# Altium PCB DAU_Kupplung_3phasig_V1_13.PcbDoc
Units mm, origin at the board's own origin, x right, y up, seen from the top; angles counter-clockwise.
Board outline 152.4 x 100.03 mm, 2 copper layers (Top, Bottom), stack 1.57 mm thick; 109 components, 76 nets, 355 pads, 18 vias.
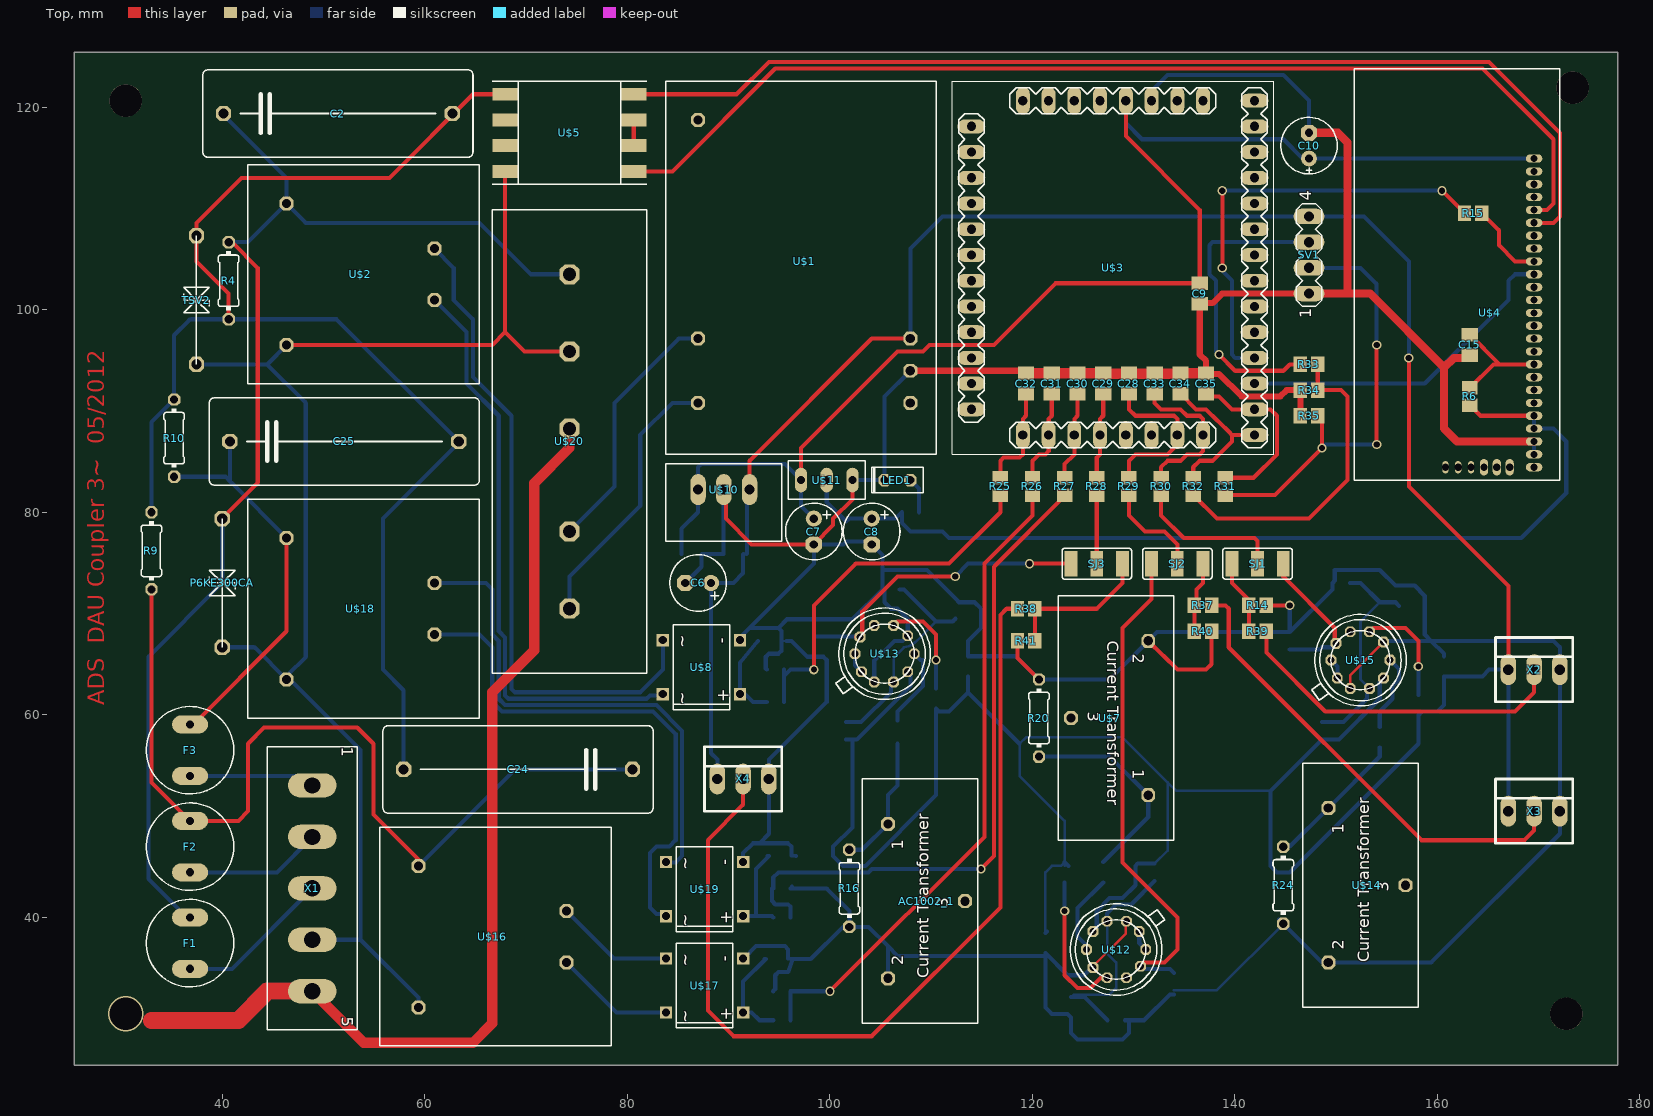
[diagram p0: Top view]
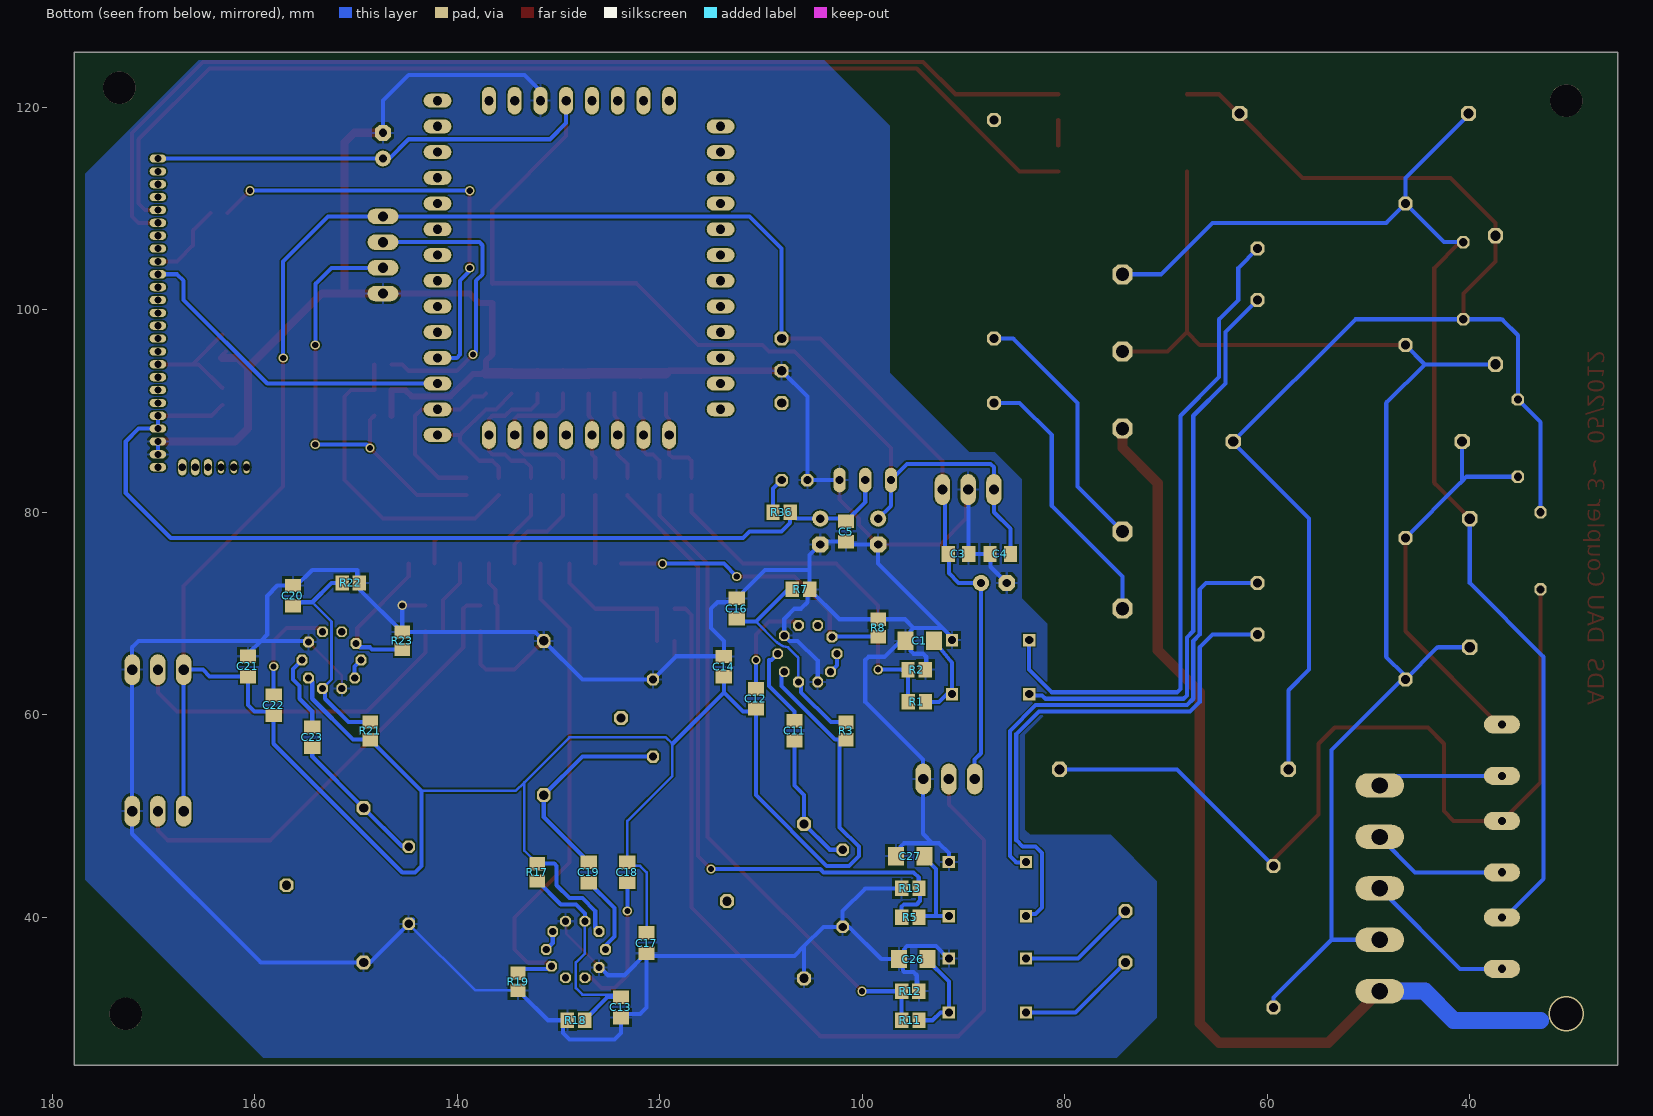
[diagram p1: Bottom view, seen from below]

## Layer stack, top to bottom
Top Solder: solder mask 0.0102, Solder Resist, Dk 3.5
Top: signal copper 0.035
Dielectric 1: core 1.5, FR-4, Dk 4.8
Bottom: signal copper 0.035
Bottom Solder: solder mask 0.0102, Solder Resist, Dk 3.5

## Board outline
25.4,25.4 177.8,25.4 177.8,125.425 25.4,125.425

## Design rules (kind name [scope] priority, off if disabled: settings)
Clearance mdViaVia [IsVia vs IsVia] p1: gap=0.15
Clearance mdPadVia [IsPad vs IsVia] p2: gap=0.15
Clearance mdPadPad [IsPad vs IsPad] p3: gap=0.15
Clearance mdWireVia [(InLayerClass('Signal Layers') AND IsTrack) vs IsVia] p4: gap=0.15
Clearance mdWirePad [(InLayerClass('Signal Layers') AND IsTrack) vs IsPad] p5: gap=0.15
Clearance mdWireWire [(InLayerClass('Signal Layers') AND IsTrack) vs (InLayerClass('Signal Layers') AND IsTrack)] p6: gap=0.15
Clearance [All] p7: gap=0.15
HoleSize [All] p1: absolutevalues=TRUE maxlimit=2540 minlimit=0.3 maxpercent=80.000 minpercent=20.000
HoleToHoleClearance [All] p1: gap=0.2 allowstackedmicrovias=TRUE
PolygonConnect ThermalVias [IsVia] p1: connectstyle=Direct reliefconductorwidth=0.254 reliefentries=4 polygonreliefangle="90 Angle" airgapwidth=0.254
PolygonConnect [All] p2: connectstyle=Relief reliefconductorwidth=0.254 reliefentries=4 polygonreliefangle="90 Angle" airgapwidth=0.254
RoutingVias [All] p1: holewidth=0.711 width=1.27 viastyle="Through Hole" minholewidth=0.711 minwidth=1.27 maxholewidth=0.711 maxwidth=1.27
SilkToSilkClearance [All] p1 off: silktosilkclearance=0.254
SilkToSolderMaskClearance [IsPad] p1 off: minsilkscreentomaskgap=0.254 clearancetoexposedcopper=TRUE
SolderMaskExpansion [All] p1: expansion=0.075
Width [All] p1: maxlimit=2540 minlimit=0.15 preferedwidth=0.254
26 further rules are at their usual default settings.

## Components (designator, comment, footprint, x,y, rotation, side; value= is the part's Value field where it differs from the comment)
AC1002_1 "" AC1010 114.63,28.905 r90 top
C1 "4,7µ" C1206 94.31,67.31 r0 bottom
C2 "470n/270V" C225-087X268 51.435,119.38 r0 top
C3 "100n" C0805K 90.5,75.895 r180 bottom
C4 "100n" C0805K 86.36,75.895 r0 bottom
C5 "100n" C0805K 101.6,78.105 r270 bottom
C6 "4,7µ" E2,5-6 86.995,73.025 r180 top
C7 "4,7µ" E2,5-6 98.425,78.105 r270 top
C8 "4,7µ" E2,5-6 104.14,78.105 r270 top
C9 "100n" C0805K 136.525,101.6 r90 top
C10 "4µ7" E2,5-6E 147.32,116.205 r90 top
C11 "1µ" C0805K 106.68,58.42 r90 bottom
C12 "4µ7" C0805K 110.49,61.595 r270 bottom
C13 "1µ" C0805K 123.825,31.115 r270 bottom
C14 "1µ" C0805K 113.665,64.77 r270 bottom
C15 "1µ" C0805K 163.195,96.52 r90 top
C16 "1µ" C0805K 112.395,70.485 r90 bottom
C17 "1µ" C0805K 121.285,37.465 r90 bottom
C18 "4µ7" C0805K 123.19,44.45 r90 bottom
C19 "1µ" C0805K 127,44.45 r270 bottom
C20 "1µ" C0805K 156.21,71.755 r90 bottom
C21 "1µ" C0805K 160.655,64.77 r90 bottom
C22 "4µ7" C0805K 158.115,60.96 r270 bottom
C23 "1µ" C0805K 154.305,57.785 r90 bottom
C24 "470n/270V" C225-087X268 69.215,54.61 r180 top
C25 "470n/270V" C225-087X268 52.07,86.995 r0 top
C26 "4,7µ" C1206 94.945,35.89 r0 bottom
C27 "4,7µ" C1206 95.25,46.05 r0 bottom
C28 "100n" C0805K 129.54,92.71 r90 top
C29 "100n" C0805K 127,92.71 r90 top
C30 "100n" C0805K 124.46,92.71 r90 top
C31 "100n" C0805K 121.92,92.71 r90 top
C32 "100n" C0805K 119.38,92.71 r90 top
C33 "100n" C0805K 132.08,92.71 r90 top
C34 "100n" C0805K 134.62,92.71 r90 top
C35 "100n" C0805K 137.16,92.71 r90 top
F1 "T250mA/240V" TR5 36.83,37.465 r90 top
F2 "T250mA/240V" TR5 36.83,46.99 r90 top
F3 "T250mA/240V" TR5 36.83,56.515 r90 top
LED1 "" LED2X5 106.68,83.185 r180 top
P6KE300CA "" TSV 40.005,74.295 r270 top
R1 "820k" R0805 94.615,61.29 r180 bottom
R2 "180k" R0805 94.615,64.465 r0 bottom
R3 "22k" R0805 101.6,58.42 r270 bottom
R4 "470k" 0204/7 40.64,102.87 r90 top
R5 "820k" R0805 95.25,40.005 r180 bottom
R6 "1M" R0805 163.195,91.44 r90 top
R7 "10k" R0805 106.045,72.39 r0 bottom
R8 "4k7" R0805 98.425,68.58 r90 bottom
R9 "470k" 0204/7 33.02,76.2 r270 top
R10 "470k" 0204/7 35.255,87.325 r270 top
R11 "820k" R0805 95.25,29.845 r180 bottom
R12 "180k" R0805 95.25,32.715 r0 bottom
R13 "180k" R0805 95.25,42.875 r180 bottom
R14 "220R/33k" R0805 142.24,70.815 r180 top
R15 "330R" R0805 163.525,109.55 r0 top
R16 "68R" 0204/7 101.93,42.875 r90 top
R17 "22k" R0805 132.08,44.45 r90 bottom
R18 "10k" R0805 128.27,29.845 r180 bottom
R19 "4k7" R0805 133.985,33.655 r270 bottom
R20 "68R" 0204/7 120.65,59.69 r270 top
R21 "22k" R0805 148.59,58.42 r270 bottom
R22 "10k" R0805 150.495,73.025 r0 bottom
R23 "4k7" R0805 145.415,67.31 r90 bottom
R24 "68R" 0204/7 144.78,43.18 r90 top
R25 "10R" R0805 116.84,82.55 r90 top
R26 "10R" R0805 120.015,82.55 r90 top
R27 "10R" R0805 123.19,82.55 r90 top
R28 "10R" R0805 126.365,82.55 r90 top
R29 "10R" R0805 129.54,82.55 r90 top
R30 "10R" R0805 132.715,82.55 r90 top
R31 "10R" R0805 139.065,82.55 r90 top
R32 "10R" R0805 135.89,82.55 r90 top
R33 "680k" R0805 147.32,94.615 r180 top
R34 "470k" R0805 147.32,92.075 r0 top
R35 "220R" R0805 147.32,89.535 r0 top
R36 "330R" R0805 107.95,80.01 r0 bottom
R37 "0/82k" R0805 136.855,70.815 r180 top
R38 "0/82k" R0805 119.38,70.485 r0 top
R39 "0/82k" R0805 142.24,68.275 r180 top
R40 "220R/33k" R0805 136.855,68.275 r180 top
R41 "220R/33k" R0805 119.38,67.31 r0 top
SJ1 "" SJ_2W 142.24,74.93 r0 top
SJ2 "" SJ_2W 134.315,74.93 r180 top
SJ3 "" SJ_2W 126.365,74.93 r180 top
SV1 "" MA04-1 147.32,105.41 r90 top
TSV2 "" TSV 37.465,102.235 r270 top
U$1 "" RAC04_12SA 83.82,122.555 r270 top
U$2 "" TRAFO_0,35VA 42.545,92.71 r0 top
U$3 "" ADUC_MINIMUM 128.27,104.14 r0 top
U$4 "" MODEM_FUSS 160.655,104.775 r90 top
U$5 "" PLC-UEBERTRAGER_V2 74.295,117.475 r0 top
U$7 "" AC1010 122.555,72.39 r270 top
U$8 "" RECTIFIER 83.515,68.91 r270 top
U$10 "" RECOM785X 89.535,84.785 r180 top
U$11 "" TS1084_HOCH 102.235,83.185 r180 top
U$12 "" TO100_10PIN 128.27,36.83 r90 top
U$13 "" TO100_10PIN 105.41,66.04 r270 top
U$14 "" AC1010 158.115,30.48 r90 top
U$15 "" TO100_10PIN 152.4,65.405 r270 top
U$16 "" TRAFO_0,35VA 55.575,27.305 r0 top
U$17 "" RECTIFIER 83.82,37.465 r270 top
U$18 "" TRAFO_0,35VA 42.545,59.69 r0 top
U$19 "" RECTIFIER 83.82,46.99 r270 top
U$20 "" NETZFILTER 66.675,109.855 r270 top
X1 "" CONNECTOR_5_POL 44.45,56.845 r270 top
X2 "22-23-2031" 22-23-2031 169.545,64.465 r0 top
X3 "22-23-2031" 22-23-2031 169.545,50.495 r0 top
X4 "22-23-2031" 22-23-2031 91.44,53.67 r0 top

## Footprints (in the part's own frame and the unit in brackets; to place one, negate y for a bottom-side part, rotate by r counter-clockwise, add the part's x,y. Pads: shape width x height; smd on the part's side, far side on the other; paste and mask are expansions set on the pad)
22-23-2031 [mil] "22-23-2031"
  oval 60x120 hole 40: 1(-100,0) 2(0,0) 3(100,0)
  silkscreen extent -150,-125 150,125
0204/7 [mil] "0204/7"
  oct 48x48 hole 32: 1(-150,0) 2(150,0)
  silkscreen extent -115,-40 115,40
AC1010 [mil] "AC1010"
  oct 54x54 hole 36: P$1(800,350) P$2(200,350) P$3(500,50)
  silkscreen extent 25,0 975,450
ADUC_MINIMUM [mil] "ADUC_MINIMUM"
  oval 54x108 hole 36: ADC0(-362.5,-650) ADC1(-262.5,-650) ADC2(-162.5,-650) ADC3(-62.5,-650) ADC4(238,-650) ADC5(338,-650) DAC0(38,-650) DAC1(138,-650) GND(138,650) GND2(-162.5,650) GND3(-262.5,650) P22(338,650) P23(238,650) P24(-362.5,650) VCC(38,650) VCC1(-62.5,650)
  oval 108x54 hole 36: ADC6(538,-650) ADC7(538,-550) ALE(-562.5,250) INT0(538,-250) MISO(538,-150) MOSI(538,450) P00(-562.5,150) P01(-562.5,50) P02(-562.5,-50) P03(-562.5,-150) P04(-562.5,-250) P05(-562.5,-350) P06(-562.5,-450) P07(-562.5,-550) P20(538,550) P21(538,650) P25(-562.5,550) P34(538,-50) P35(538,50) P36(538,150) P37(538,250) PWM0(-562.5,450) PWM1(-562.5,350) RXD(538,-450) SCLOCK(538,350) TXD(538,-350)
  silkscreen extent -638,-725 612,725
C225-087X268 [mil] "C225-087X268"
  oct 60x60 hole 40: 1(-445,0) 2(445,0)
  silkscreen extent -525,-170 525,170
C0805K [mil] "C0805K"
  rect 52x63 smd: 1(-39.37,0) 2(40,0)
C1206 [mil] "C1206"
  rect 63x71 smd: 1(-55.12,0) 2(56,0)
CONNECTOR_5_POL [mil] "CONNECTOR_5_POL"
  oval 94.5x189 hole 63: P$1(150,175) P$2(350,175) P$3(550,175) P$4(750,175) P$5(950,175)
  silkscreen extent 0,0 1100,350
E2,5-6 [mil] "E2,5-6"
  round 63 hole 32: +(-50,0)
  oct 63x63 hole 32: -(50,0)
  silkscreen extent -110,-110 110,110
E2,5-6E [mil] "E2,5-6E"
  round 62 hole 32: +(-50,0)
  oct 62x62 hole 32: -(50,0)
  silkscreen extent -110,-110 110,110
LED2X5 [mil] "LED2X5"
  oct 48x48 hole 32: A(-50,0) K(50,0)
  silkscreen extent -100,-50 100,50
MA04-1 [mil] "MA04-1"
  oval 60x120 hole 40: 1(-150,0) 2(-50,0) 3(50,0) 4(150,0)
  silkscreen extent -200,-50 200,50
MODEM_FUSS [mil] "MODEM_FUSS"
  oval 32x64 hole 28: P$1(-800,-350) P$2(-750,-350) P$3(-700,-350) P$4(-650,-350) P$5(-600,-350) P$6(-550,-350) P$7(-500,-350) P$8(-450,-350) P$9(-400,-350) P$10(-350,-350) P$11(-300,-350) P$12(-250,-350) P$13(-200,-350) P$14(-150,-350) P$15(-100,-350) P$16(-50,-350) P$17(0,-350) P$18(50,-350) P$19(100,-350) P$20(150,-350) P$21(200,-350) P$22(250,-350) P$23(300,-350) P$24(350,-350) P$25(400,-350)
  oval 48x24 hole 28: P$26(-800,-5) P$27(-800,-55) P$28(-800,-105)
  oval 64x32 hole 28: P$29(-800,-155) P$30(-800,-205) P$31(-800,-255)
  silkscreen extent -850,-450 750,350
NETZFILTER [mil] "NETZFILTER"
  oct 78x78 hole 52: L(250,300) L'(1550,300) N(550,300) N'(1250,300) PE(850,300)
  silkscreen extent 0,0 1800,600
PLC-UEBERTRAGER_V2 [mm] "PLC-UEBERTRAGER_V2"
  rect 2.54x1.27 smd: 1LINE1(6.35,3.81) 2(6.35,1.27) 3(6.35,-1.27) 4LINE2(6.35,-3.81) 6NC(-6.35,1.27) 7NC(-6.35,-1.27) 8N(-6.35,-3.81) L5(-6.35,3.81)
  silkscreen extent -7.62,-5.08 7.62,5.08
R0805 [mil] "R0805"
  rect 52x60 smd: 1(-33.46,0) 2(34,0)
RAC04_12SA [mil] "RAC04_12SA"
  oct 54x54 hole 36: +VO(1000,950) GND(1125,950) L(1250,125) N(1000,125) NC(150,125) NC1(1250,950)
  silkscreen extent 0,0 1450,1050
RECOM785X [mil] "RECOM785X"
  oval 60x120 hole 40: GND(0,100) VIN(-100,100) VOUT(100,100)
  silkscreen extent -225,0 225,300
RECTIFIER [mil] "RECTIFIER"
  rect 48x48 hole 32: +(270,300) -(60,300) ~1(60,0) ~2(270,0)
  silkscreen extent 0,40 330,260
SJ_2W [mm] "SJ_2W"
  rect 1.27x2.54 smd: 1(-2.54,0) 2(0,0) 3(2.54,0)
  silkscreen extent -3.43,-1.52 3.43,1.52
TO100_10PIN [mil] "TO100_10PIN"
  oct 42x42 hole 28: 1(110,-40) 2(110,35) 3(70,90) 4(0,115) 5(-70,90) 6(-110,35) 7(-110,-40) 8(-65,-95) 9(0,-115) 10(70,-90)
  silkscreen extent -178,-190 178,178
TR5 [mil] "TR5"
  oval 70x140 hole 32: 1(-100,0) 2(100,0)
  silkscreen extent -170,-170 170,170
TRAFO_0,35VA [mil] "TRAFO_0,35VA"
  oct 54x54 hole 36: L(150,700) N(150,150) OUT1(725,525) OUT2(725,325)
  silkscreen extent 0,0 900,850
TS1084_HOCH [mil] "TS1084_HOCH"
  oval 48x96 hole 32: GND(0,0) IN(200,0) OUT(100,0)
  silkscreen extent -50,-75 250,75
TSV [mil] "TSV"
  oct 60x60 hole 40: P$1(-200,0) P$2(300,0)
  silkscreen extent -200,-50 300,50

## Part data
AC1002_1 U$7 U$14: library part AC1010
C1 C26 C27: library part C1206
C2 C24 C25: library part C225-087X268
C3 C4 C5 C9 C11 C12 C13 C14 C15 C16 C17 C18 C19 C20 C21 C22 C23 C28 C29 C30 C31 C32 C33 C34 C35: library part C0805K
C6 C7 C8: library part E2,5-6
C10: library part E2,5-6E
F1 F2 F3: library part TR5
LED1: library part LED2X5
P6KE300CA TSV2: library part TSV
R1 R2 R3 R5 R6 R7 R8 R11 R12 R13 R14 R15 R17 R18 R19 R21 R22 R23 R25 R26 R27 R28 R29 R30 R31 R32 R33 R34 R35 R36 R37 R38 R39 R40 R41: library part R0805
R4 R9 R10 R16 R20 R24: library part 0204/7
SJ1 SJ2 SJ3: library part SJ_2W
SV1: library part MA04-1
U$1: library part RAC04_12SA
U$2 U$16 U$18: library part TRAFO_0,35VA
U$3: library part ADUC_MINIMUM
U$4: library part MODEM_FUSS
U$5: library part PLC-UEBERTRAGER_V2
U$8 U$17 U$19: library part RECTIFIER
U$10: library part RECOM785X
U$11: library part TS1084_HOCH
U$12 U$13 U$15: library part TO100_10PIN
U$20: library part NETZFILTER
X1: library part CONNECTOR_5_POL

## Free pads (board coordinates)
  round 3.2 hole 3.2: 1(30.48,120.65) 1(172.72,30.48) 1(173.355,121.92)

## Via types
v1: diameter 0.91/0.91 (per signal layer), hole 0.61, Top to Bottom, 17 vias
v2: diameter 3.5/3.5 (per signal layer), hole 3.2, Top to Bottom, 1 vias

## Nets (pads, with @x,y where several pads share a name; then routed paths per layer and width w, separated by ;. In a path a pad name is that pad's centre, name@x,y a point inside that pad or via, vN(x,y) a via of type N, cw(c..) or ccw(c..) an arc to the next point about the centre after c; other vN are vias at no path point)
+3V3: C5.1 C8.+ R6.1 R36.1 U$4.P$4 U$4.P$5 U$11.OUT | length 96.7
  Top w0.406: R6.1@163.195,90.602 164.262,89.535 U$4.P$5
  Bottom w0.406: U$11.OUT 99.695,81.026 101.6,79.121 101.879,79.375 C8.+ 106.477,79.375 107.112,80.01 107.112,78.969 107.95,78.105 111.125,78.105 111.76,77.47 168.275,77.47 172.72,81.915 172.72,86.995 171.45,88.265 U$4.P$4 U$4.P$5
+5V: C4.1 C7.+ C9.2 C10.+ U$3.VCC U$4.P$25 U$10.VOUT U$11.IN | length 139.2
  Top w0.406: U$11.IN 97.155,86.36 106.68,95.885 109.22,95.885 109.855,96.52 116.205,96.52 122.301,102.616 C9.2 ; U$3.VCC 129.235,117.17 136.525,109.855 C9.2 ; C9.2@136.525,102.565 C9.2
  Bottom w0.406: C4.1@85.369,75.895 85.369,78.384 86.995,80.01 U$10.VOUT 86.995,84.455 87.325,84.785 95.58,84.785 U$11.IN 97.155,80.645 C7.+ ; U$3.VCC 129.235,118.44 130.81,116.84 144.78,116.84 146.685,114.935 C10.+ U$4.P$25@169.875,114.935
+12V: C3.1 C6.+ C12.2 C14.2 C17.2 C18.2 C21.1 C22.2 R3.2 R17.2 R21.2 SV1.4 U$1.+VO U$10.VIN U$12.3 U$13.3 U$15.3 X2.1 X3.1 X4.1 | length 361.2
  Top w0.406: U$10.VIN 92.075,85.09 104.14,97.155 U$1.+VO ; v1(157.175,95.25) 157.175,82.55 167.005,72.72 X2.1
  Bottom w0.254: C17.2 121.285,44.45 121.92,45.085 122.834,45.085 C18.2 ; C18.2@123.19,45.085 C18.2 ; R17.2 133.35,46.584 133.35,53.34 ; 143.51,52.502 134.214,52.502 133.35,53.34 ; C18.2 123.19,49.53 118.745,53.975 118.745,57.15 119.38,57.785 128.905,57.785 133.35,53.34
  Bottom w0.406: X4.1 88.9,55.575 88.265,56.21 C6.+ 90.5,73.025 91.44,73.99 91.44,75.844 C3.1@91.491,75.895 ; C3.1@91.77,75.895 91.821,75.946 91.821,81.661 U$10.VIN ; R3.2@101.6,57.582 R3.2@102.235,57.582 ; U$13.3 107.95,64.008 107.95,62.865 102.667,57.582 R3.2@102.235,57.582 ; U$1.+VO 107.95,106.045 111.125,109.22 SV1.4 152.73,109.22 157.175,104.775 v1(157.175,95.25) ; C14.2@113.665,63.779 113.665,62.23 ; 118.745,57.15 113.665,62.23 ; C17.2 C17.2@121.437,38.608 ; C18.2 C18.2@123.571,45.085 ; U$12.3 126.365,38.989 126.365,40.64 127.635,41.91 128.905,41.91 130.175,43.18 130.175,45.085 130.404,45.314 R17.2 ; U$15.3 154.305,63.246 154.305,61.595 150.292,57.582 148.59,57.582 143.51,52.502 143.51,45.085 144.145,44.45 145.415,44.45 158.115,57.15 158.115,59.969 158.496,60.325 160.02,60.325 160.655,60.96 160.655,63.779 164.44,63.779 165.1,64.465 X2.1 X3.1 ; R3.2@102.235,57.582 102.235,48.895 100.33,46.99 100.33,46.05 101.295,45.085 103.505,45.085 110.49,52.07 110.49,60.604 110.769,60.325 111.76,60.325 113.665,62.23
ADC0: C32.1 R25.2 U$3.ADC0 | length 10.3
  Top w0.406: R25.2 116.84,85.09 117.17,85.42 118.745,85.42 119.075,85.725 119.075,87.63 119.075,89.23 119.38,89.535 C32.1@119.38,91.719
ADC1: C31.1 R26.2 U$3.ADC1 | length 9.5
  Top w0.406: R26.2 120.015,85.09 120.65,85.725 121.285,85.725 121.615,86.055 121.615,87.63 121.615,89.23 121.92,89.535 C31.1@121.92,91.719
ADC2: C30.1 R27.2 U$3.ADC2 | length 8.9
  Top w0.406: R27.2 123.19,84.785 124.155,85.725 124.155,87.63 124.155,89.23 124.46,89.535 C30.1@124.46,91.77
ADC3: C29.1 R28.2 U$3.ADC3 | length 8.6
  Top w0.406: R28.2 126.365,85.42 126.695,85.725 126.695,87.63 126.695,89.23 127,89.535 C29.1@127,91.719
ADC4: C28.1 R29.2 U$3.ADC4 | length 16.4
  Top w0.406: R29.2 129.54,85.09 130.175,85.725 133.35,85.725 134.315,86.69 U$3.ADC4 134.315,89.23 133.985,89.535 130.175,89.535 129.54,90.17 C28.1@129.54,91.719
ADC5: C33.1 R30.2 U$3.ADC5 | length 15.4
  Top w0.406: C33.1@132.08,91.719 132.08,90.805 132.715,90.17 134.62,90.17 135.255,89.535 136.525,89.535 136.855,89.23 U$3.ADC5 136.855,86.055 136.525,85.725 135.255,85.725 134.62,85.09 133.35,85.09 132.715,84.455 R30.2
GND: AC1002_1.P$2 C1.2 C3.2 C4.2 C5.2 C6.- C7.- C8.- C9.1 C10.- C13.2 C14.1 C15.1 C16.2 C17.1 C20.2 C21.2 C26.2 C27.2 C28.2 C29.2 C30.2 C31.2 C32.2 C33.2 C34.2 C35.2 LED1.K R2.1 R7.1 R8.2 R12.1 R13.1 R14.1 R16.1 R18.1 R19.2 R20.1 R22.1 R23.2 R24.1 R34.1 R35.1 R40.1 R41.1 SV1.1 U$1.GND U$3.GND U$4.P$2 U$4.P$3 U$7.P$2 U$8.- U$10.GND U$11.GND U$12.1 U$12.5 U$13.1 U$13.5 U$14.P$2 U$15.1 U$15.5 U$17.- U$19.- X2.3 X3.3 X4.3 | length 547.9
  Top w0.254: U$12.5 125.984,35.179 129.235,38.43 129.235,39.573 U$12.1 ; U$15.1 151.384,63.881 U$15.5
  Top w0.406: U$10.GND 89.738,81.737 89.738,79.4 92.278,76.835 C7.- 100.33,78.74 100.33,79.375 102.235,81.28 U$11.GND ; R41.1@118.542,67.31 118.542,65.634 R20.1 ; C32.2@119.126,93.98 C32.2 ; U$7.P$2 134.315,64.465 137.16,64.465 137.693,64.999 R40.1@137.693,68.275 ; R14.1@143.104,70.815 v1(145.415,70.815) ; C15.1@162.839,95.885 C15.1@163.195,95.529
  Top w0.61: U$1.GND C32.2@119.126,93.98 ; R35.1@146.482,89.535 146.482,91.973 R34.1@146.38,92.075 ; R34.1@146.482,92.075 R34.1@146.38,92.075 ; SV1.1 138.76,101.6 137.795,100.66 136.525,100.66 136.525,95.58 137.16,94.945 137.16,93.675 138.43,93.675 140.665,91.44 144.475,91.44 145.11,92.075 R34.1@146.38,92.075
  Top w0.813: SV1.1@147.015,101.6 SV1.1 151.13,101.6 ; C10.- 150.19,117.475 151.13,116.535 151.13,101.6 ; C15.1@163.195,95.25 161.62,95.25 160.655,94.31 ; U$4.P$3 161.925,86.995 160.655,88.265 160.655,94.31 ; 151.13,101.6 153.365,101.6 160.655,94.31
  Top w1.016: C32.2 121.895,93.726 C31.2@121.92,93.675 ; C31.2 C30.2 C29.2 127,93.675 129.515,93.675 C28.2 129.54,93.675 132.055,93.675 C33.2 132.08,93.675 134.595,93.675 C34.2 C35.2
  Bottom w0.254: 95.25,66.37 95.25,67.285 C1.2@95.707,67.31 ; C17.1@121.031,36.195 C17.1@121.285,36.474 ; R19.2@133.985,32.817 138.227,32.817 R24.1
  Bottom w0.406: C6.- 87.325,74.625 87.325,75.844 C4.2 89.51,75.895 89.51,82.194 U$10.GND ; U$8.- 91.135,67.64 92.075,68.58 ; U$17.- 91.516,35.941 92.71,37.16 95.58,37.16 95.885,36.83 95.885,35.941 C26.2@96.342,35.89 ; U$19.- 91.44,46.355 92.405,47.32 93.04,47.32 ; R2.1@93.777,64.465 93.675,64.567 93.675,65.735 93.98,66.04 94.945,66.04 95.25,66.37 95.25,68.275 94.945,68.58 ; R12.1@94.412,32.715 94.615,32.918 94.615,34.29 94.945,34.62 95.885,34.62 95.936,34.671 C26.2@96.342,35.89 ; C1.2@95.707,67.31 96.215,67.31 97.79,65.735 99.39,65.735 99.695,65.405 99.695,61.29 93.98,55.575 X4.3 93.98,48.26 93.04,47.32 ; R13.1@96.266,43.028 96.114,42.875 99.695,42.875 101.93,40.64 R16.1 ; C27.2 96.215,46.101 96.215,46.99 95.885,47.32 93.04,47.32 ; U$11.GND LED1.K 105.41,91.44 U$1.GND ; U$13.1 104.394,65.354 106.375,67.31 107.188,67.31 U$13.5 107.696,69.469 106.68,70.485 106.045,70.485 105.41,71.12 105.41,72.187 R7.1@105.207,72.39 ; AC1002_1.P$2 105.74,37.16 ; C17.1@121.031,36.195 106.68,36.195 105.74,37.16 ; U$12.5 125.857,35.052 125.095,34.29 123.469,34.29 121.285,36.474 121.285,31.115 121.92,30.48 123.469,30.48 123.825,30.124 123.825,28.575 124.46,27.94 128.905,27.94 129.54,28.575 R18.1@129.54,29.845 ; R18.1@129.134,29.845 131.039,29.845 133.579,32.385 R19.2@133.985,32.385 ; U$3.GND 131.775,121.615 133.35,123.19 144.78,123.19 147.32,120.65 C10.- ; R24.1@144.374,39.802 R24.1 148.59,35.56 U$14.P$2 159.385,35.56 172.085,48.26 X3.3@172.085,49.86 ; v1(145.415,70.815) R23.2 ; U$15.5 154.813,67.31 159.385,67.31 ; C21.2 160.655,66.04 159.385,67.31 ; U$4.P$2 U$4.P$3 ; X3.3 X2.3 172.085,66.675 171.45,67.31 159.385,67.31 ; 92.075,68.58 98.425,74.93 C7.- 101.346,76.835 101.6,77.114 103.886,77.114 C8.- 105.207,75.794 105.207,74.295 ; 92.075,68.58 94.945,68.58 ; 94.945,68.58 95.783,69.444 R8.2 102.235,69.444 R7.1@105.207,72.39 ; C26.2@96.342,35.89 98.12,35.89 101.295,39.065 R16.1 ; R16.1 103.835,39.065 105.74,37.16 ; R7.1@105.207,72.39 105.207,74.295 ; 105.207,74.295 109.601,74.295 C16.2 112.776,71.12 114.3,71.12 114.935,70.485 114.935,68.58 113.665,67.31 113.665,65.786 118.389,65.786 R20.1 127.635,63.5 U$7.P$2 132.309,68.174 R23.2 ; R23.2 149.657,72.39 149.657,73.025 149.86,73.254 149.86,74.295 154.305,74.295 155.854,72.771 C20.2 157.759,72.771 158.75,71.755 158.75,67.945 159.385,67.31
I1: R28.1 SJ3.2 | length 6.8
  Top w0.406: SJ3.2 R28.1@126.365,81.712
I1INTERN: R8.1 SJ3.3 U$13.8 | length 30.1
  Top w0.406: U$13.8@102.616,67.691 U$13.8 103.2,67.894 103.2,70.18 106.68,73.66 v1(112.395,73.66) ; v1(119.71,74.93) SJ3.3
  Bottom w0.406: R8.1@98.425,67.742 102.972,67.742 U$13.8 ; v1(112.395,73.66) 113.665,74.93 v1(119.71,74.93)
I2: R29.1 SJ2.2 | length 9.9
  Top w0.406: R29.1@129.54,81.712 129.54,79.705 131.14,78.105 133.045,78.105 134.315,76.835 SJ2.2
I2INTERN: R19.1 SJ2.3 U$12.8 | length 49.8
  Top w0.406: U$12.8 131.064,35.56 133.045,35.56 134.315,36.83 134.315,40.005 128.905,45.415 128.905,68.58 131.775,71.45 SJ2.3
  Bottom w0.406: U$12.8@130.81,35.56 130.81,34.925 133.579,34.925 R19.1@133.985,34.519
I3: R30.1 SJ1.2 | length 14.8
  Top w0.406: R30.1@132.715,81.712 132.715,79.705 134.95,77.47 141.935,77.47 142.24,77.165 SJ1.2
I3INTERN: R23.1 SJ1.3 U$15.8 | length 14.8
  Top w0.406: SJ1.3 144.78,73.66 149.86,68.58 149.86,67.183 U$15.8
  Bottom w0.406: R23.1@145.415,66.472 148.387,66.472 148.59,66.675 149.606,66.675 U$15.8
L1: C2.1 F1.2 P6KE300CA.P$1 R4.2 U$2.L U$20.L | length 123.5
  Top w0.406: P6KE300CA.P$1 43.409,82.779 ; R4.2 R4.2@40.843,106.68 ; R4.2@41.072,106.604 43.51,104.14 43.51,83.007
  Bottom w0.406: F1.2 36.525,40.005 32.715,43.815 32.715,65.735 40.005,73.025 P6KE300CA.P$1 ; C2.1@40.005,119.38 46.355,113.03 U$2.L ; R4.2 42.545,106.68 U$2.L ; U$20.L 70.485,103.505 65.405,108.585 48.26,108.585 U$2.L
L2: C24.1 F2.2 R9.2 U$16.L | length 89.9
  Top w0.406: R9.2 33.02,53.34 F2.2 41.605,49.53 42.545,50.495 42.545,57.15 44.145,58.75 53.34,58.75 54.94,57.15 54.94,50.165 59.385,45.72 U$16.L
  Bottom w0.406: U$16.L 68.91,54.61 C24.1
L3: C25.1 F3.2 R10.2 U$18.L | length 39.8
  Top w0.406: F3.2 37.16,59.055 46.279,68.174 ; 46.355,68.402 U$18.L
  Bottom w0.406: R10.2 40.335,83.515 40.767,83.058 ; C25.1 40.767,83.058 ; U$18.L 40.97,82.88 40.767,83.058
N: P6KE300CA.P$2 TSV2.P$2 U$2.N U$5.8N U$16.N U$18.N U$20.N X1.P$4 | length 138.3
  Top w0.406: U$2.N 66.675,96.52 67.945,97.79 ; U$16.N U$16.N@59.385,31.445 ; U$5.8N 67.945,97.79 ; U$20.N 69.85,95.885 67.945,97.79
  Bottom w0.406: TSV2.P$2 44.45,94.615 ; P6KE300CA.P$2 43.053,66.675 ; 43.282,66.599 U$18.N ; U$18.N@46.355,63.703 U$18.N ; U$2.N 44.45,94.615 ; U$18.N@46.457,63.932 48.26,65.735 48.26,90.678 ; 48.184,90.907 44.45,94.615 ; X1.P$4 53.67,37.795 ; U$16.N 59.385,32.08 53.67,37.795 ; U$18.N 46.685,63.5 53.67,56.515 53.67,37.795
N$1: R15.2 U$4.P$17 | length 8
  Top w0.406: R15.2@164.363,109.55 166.065,107.848 166.065,106.375 167.64,104.775 U$4.P$17
N$2: AC1002_1.P$1 C11.1 R16.2 | length 13.2
  Bottom w0.406: R16.2 103.2,46.685 AC1002_1.P$1 105.74,52.07 106.68,53.035 C11.1@106.68,57.15
N$3: C11.2 U$13.4 | length 8.2
  Bottom w0.406: C11.2 106.68,60.325 109.22,62.865 109.22,65.405 108.966,65.405 U$13.4
N$4: U$2.OUT1 U$8.~1 | length 65.6
  Bottom w0.406: U$2.OUT1 62.865,104.14 62.865,100.965 64.77,99.06 64.77,93.345 68.58,89.535 68.58,62.56 68.91,62.23 81.28,62.23 83.515,64.465 U$8.~1
N$5: U$4.P$20 U$5.1LINE1 | length 106.7
  Top w0.406: U$5.1LINE1 90.805,121.285 93.98,124.46 165.1,124.46 172.085,117.475 172.085,109.22 171.45,108.585 U$4.P$20
N$6: U$13.9 U$13.10 | length 2
  Bottom w0.406: U$13.9 102.489,64.897 U$13.10
N$7: C1.1 R1.2 U$8.+ | length 8.9
  Bottom w0.406: C1.1@92.913,67.31 91.135,65.151 U$8.+ 91.643,62.052 92.405,61.29 R1.2@93.777,61.29
N$8: C35.1 R31.2 U$3.ADC7 | length 17.7
  Top w0.406: C35.1@137.16,91.719 137.439,91.44 138.43,91.44 139.7,90.17 U$3.ADC7 143.51,90.17 144.145,89.535 144.145,85.725 141.834,83.414 R31.2
N$9: U$2.OUT2 U$8.~2 | length 57.9
  Bottom w0.406: U$2.OUT2 64.135,97.79 64.135,92.71 67.31,89.535 67.31,68.275 67.945,67.64 67.945,61.925 68.275,61.595 81.915,61.595 82.245,61.925 83.515,61.925 U$8.~2
N$10: C26.1 R11.2 U$17.+ | length 9.6
  Bottom w0.406: C26.1@93.548,35.89 93.675,35.89 91.44,33.655 U$17.+ 92.278,30.607 93.04,29.845 R11.2@94.412,29.845
N$11: U$16.OUT1 U$17.~1 | length 11.8
  Bottom w0.406: U$16.OUT1 78.689,35.941 U$17.~1
N$12: U$16.OUT2 U$17.~2 | length 11.9
  Bottom w0.406: U$16.OUT2 78.943,30.607 U$17.~2
N$13: U$4.P$21 U$5.4LINE2 | length 106.4
  Top w0.406: U$5.4LINE2 84.455,113.665 94.615,123.825 164.465,123.825 171.45,116.84 171.45,110.49 170.815,109.855 U$4.P$21
N$14: R15.1 U$3.TXD | length 43.8
  Top w0.406: v1(138.76,104.14) v1(138.76,111.76) ; v1(160.452,111.76) R15.1@162.687,109.55
  Bottom w0.406: v1(138.76,104.14) 138.76,103.835 139.7,102.87 139.7,95.58 140.03,95.25 U$3.TXD ; v1(138.76,111.76) v1(160.452,111.76)
N$15: U$3.RXD U$4.P$16 | length 33.2
  Bottom w0.406: U$3.RXD 158.75,92.71 167.005,100.965 167.005,102.87 167.64,103.505 U$4.P$16
N$16: U$1.L U$20.L' | length 27.1
  Bottom w0.406: U$20.L' 74.295,73.66 81.28,80.645 81.28,87.63 84.455,90.805 U$1.L
N$17: C16.1 R3.1 R7.2 U$13.2 | length 20.1
  Bottom w0.254: U$13.2 106.299,65.659 ; 106.375,65.735 107.315,66.675 ; 108.585,67.31 110.49,69.215
  Bottom w0.406: R3.1@101.6,59.284 103.099,59.284 106.045,62.23 106.045,62.992 U$13.2 ; R7.2 107.315,72.39 110.49,69.215 112.141,69.215 C16.1@112.395,69.494
N$19: LED1.A R36.2 | length 3.5
  Bottom w0.406: LED1.A 108.814,82.347 R36.2
N$20: C15.2 R6.2 U$4.P$9 | length 11.4
  Top w0.406: R6.2 165.532,94.615 166.116,94.615 ; C15.2 166.116,94.615 ; U$4.P$9 166.116,94.615
N$21: C12.1 U$13.6 | length 10.2
  Top w0.406: U$13.6 106.68,69.215 109.22,69.215 110.49,67.945 v1(110.49,65.405)
  Bottom w0.406: C12.1@110.49,62.611 v1(110.49,65.405)
N$22: C19.1 R20.2 U$7.P$1 | length 20.8
  Bottom w0.406: R20.2 127.635,55.88 U$7.P$1 131.445,49.911 C19.1@127,45.466
N$23: C19.2 U$12.4 | length 8
  Bottom w0.406: U$12.4 125.349,37.211 124.46,38.1 124.46,40.919 C19.2@127,43.459
N$24: U$12.9 U$12.10 | length 2
  Bottom w0.406: U$12.10 130.556,37.465 U$12.9
N$25: C34.1 R32.2 U$3.ADC6 | length 15.5
  Top w0.406: C34.1@134.62,91.719 136.169,90.17 137.16,90.17 139.548,87.808 139.7,87.63 ; R32.2 135.89,84.455 136.525,85.09 137.795,85.09 139.7,86.995 139.7,87.63 ; U$3.ADC6 139.7,87.63
N$26: C2.2 C24.2 C25.2 R4.1 R9.1 R10.1 TSV2.P$1 U$5.L5 | length 138.2
  Top w0.254: C2.2 62.865,119.38 64.77,121.285
  Top w0.406: R4.1 40.64,101.6 37.465,104.775 TSV2.P$1 37.465,108.585 41.91,113.03 56.515,113.03 64.77,121.285 U$5.L5
  Bottom w0.406: R9.1 33.02,88.9 R10.1 35.255,97.485 36.754,98.984 ; 36.982,99.06 R4.1 51.308,99.06 C25.2 C25.2@62.865,86.995 ; C24.2 57.912,62.433 55.88,64.465 55.88,79.375 C25.2@63.5,86.995
N$27: C13.1 R17.1 R18.2 U$12.2 | length 23.1
  Bottom w0.254: C13.1@123.825,32.131 124.104,32.385 127.635,32.385 128.27,33.02 128.27,35.56 127.381,36.449 U$12.2
  Bottom w0.406: C13.1@123.825,32.131 125.171,32.131 R18.2@127.432,29.845 ; U$12.2 127.381,40.386 128.27,41.275 129.769,41.275 R17.1@132.08,43.612
N$29: C18.1 U$12.6 | length 14.3
  Top w0.406: v1(123.19,40.64) 123.19,34.29 124.46,33.02 125.73,33.02 126.746,34.036 U$12.6
  Bottom w0.406: v1(123.19,40.64) C18.1@123.19,43.459
N$30: C23.1 R24.2 U$14.P$1 | length 14.1
  Bottom w0.406: R24.2 145.415,46.99 U$14.P$1 154.305,55.88 C23.1@154.305,56.794
N$31: C23.2 U$15.4 | length 7.8
  Bottom w0.406: C23.2 154.305,60.325 155.575,61.595 155.575,62.865 156.21,63.5 156.21,64.516 U$15.4
N$32: U$15.9 U$15.10 | length 2
  Bottom w0.406: U$15.9 150.114,64.77 U$15.10
N$33: U$5.2 U$5.3 | length 2.5
  Top w0.406: U$5.3 U$5.2
N$34: C27.1 R5.2 U$19.+ | length 9.6
  Bottom w0.406: U$19.+ 92.71,40.132 ; C27.1@93.853,46.05 93.98,46.05 92.71,44.78 92.71,40.132 ; R5.2@94.412,40.005 94.285,40.132 92.71,40.132
N$35: U$18.OUT1 U$19.~1 | length 50.7
  Bottom w0.406: U$18.OUT1 66.04,73.025 66.675,72.39 66.675,67.945 67.31,67.31 67.31,61.595 67.945,60.96 82.88,60.96 85.42,58.42 85.42,46.05 84.785,45.415 U$19.~1@83.82,45.415
N$36: U$18.OUT2 U$19.~2 | length 51.9
  Bottom w0.406: U$18.OUT2 65.405,67.945 66.675,66.675 66.675,61.29 67.64,60.325 82.55,60.325 84.785,58.115 84.785,47.625 84.15,46.99 82.88,46.99 82.245,46.355 82.245,40.97 82.88,40.335 83.642,40.335 U$19.~2
N$37: R33.2 SV1.3 | length 30.1
  Top w0.406: v1(138.43,95.58) 140.03,93.98 144.78,93.98 145.415,94.615 R33.2@146.482,94.615
  Bottom w0.406: v1(138.43,95.58) 138.125,95.885 138.125,102.87 137.49,103.505 137.49,106.375 137.795,106.68 SV1.3
N$38: C20.1 R21.1 R22.2 U$15.2 | length 22
  Bottom w0.254: U$15.2 152.4,63.5 152.4,69.215 153.949,70.764 154.305,71.12
  Bottom w0.406: R21.1@148.59,59.284 150.724,59.284 153.035,61.595 153.035,62.357 U$15.2 ; R22.2 152.4,73.025 154.305,71.12 155.854,71.12 C20.1@156.21,70.764
N$40: C22.1 U$15.6 | length 10.8
  Top w0.406: U$15.6 153.67,68.58 156.845,68.58 158.115,67.31 v1(158.115,64.77)
  Bottom w0.406: C22.1@158.115,61.976 v1(158.115,64.77)
N$41: U$1.N U$20.N' | length 25.4
  Bottom w0.406: U$20.N' 78.74,82.55 78.74,90.805 85.09,97.155 U$1.N
N$42: R37.2 R40.2 SJ2.1 | length 7
  Top w0.406: R40.2@136.017,68.275 136.017,70.815 136.22,71.018 136.22,72.39 136.855,73.025 SJ2.1
N$43: R37.1 X3.2 | length 46
  Top w0.406: R37.1@137.693,70.815 139.065,70.815 139.395,70.485 139.395,66.675 158.445,47.625 168.605,47.625 169.545,48.59 X3.2
N$44: 
N$45: R14.2 R39.2 SJ1.1 | length 7.4
  Top w0.406: SJ1.1 139.7,73.025 141.402,71.349 141.402,70.815 141.402,68.377 R39.2@141.3,68.275
N$46: F1.1 X1.P$3 | length 15.4
  Bottom w0.406: F1.1 40.97,34.925 X1.P$3
N$47: F2.1 X1.P$2 | length 13.5
  Bottom w0.406: F2.1 45.415,44.45 X1.P$2
N$48: F3.1 X1.P$1 | length 12.5
  Bottom w0.406: F3.1 47.955,53.975 X1.P$1
N$49: R32.1 R33.1 R34.2 | length 31.8
  Top w0.406: R32.1@135.89,81.712 138.227,79.375 147.32,79.375 151.13,83.185 151.13,91.44 150.495,92.075 R34.2 R33.1@148.184,94.615
N$50: R31.1 R35.2 SV1.2 | length 43.5
  Top w0.406: R31.1@139.065,81.712 143.942,81.712 v1(148.59,86.36) 148.59,89.129 R35.2 ; v1(154,86.69) v1(154,96.52)
  Bottom w0.406: SV1.2 152.4,104.14 154,102.565 v1(154,96.52) ; v1(148.59,86.36) 148.92,86.69 v1(154,86.69)
N$51: 
N$52: 
  other v2: 30.48,30.48
N$53: R39.1 X2.2 | length 34
  Top w0.406: R39.1@143.104,68.275 143.104,66.167 148.92,60.325 167.64,60.325 169.545,62.23 X2.2
N$54: R38.2 R41.2 SJ3.1 | length 14.8
  Top w0.406: R41.2 R38.2 126.365,70.485 128.905,73.025 SJ3.1
N$55: R38.1 X4.2 | length 90.3
  Top w0.406: X4.2 91.44,51.13 87.96,47.625 87.96,30.81 90.5,28.27 104.14,28.27 116.84,40.97 116.84,69.85 117.475,70.485 R38.1@118.542,70.485
PE: U$20.PE X1.P$5 | length 116.7
  Top w1.016: X1.P$5 53.975,27.635 64.77,27.635 66.675,29.54 66.675,62.23 70.815,66.37 70.815,82.88 74.295,86.36 U$20.PE
  Top w1.676: 33.02,29.845 41.605,29.845 44.45,32.715 X1.P$5
  Bottom w1.676: 33.02,29.845 41.605,29.845 44.45,32.715 X1.P$5
U1: R1.1 R2.2 R25.1 | length 36.7
  Top w0.406: v1(98.425,64.465) 98.425,70.815 102.565,74.93 111.76,74.93 116.84,80.01 R25.1@116.84,81.712
  Bottom w0.406: R1.1@95.479,61.29 R2.2@95.479,63.83 ; R2.2 R2.2@95.479,63.83 ; v1(98.425,64.465) 96.114,64.465 R2.2@95.479,63.83
U2: R11.1 R12.2 R26.1 | length 64.1
  Top w0.406: v1(100.025,32.715) 115.265,47.955 115.265,74.93 120.015,79.705 R26.1@120.015,81.712
  Bottom w0.406: R11.1@96.114,29.845 96.114,32.614 R12.2@96.215,32.715 ; R12.2 v1(100.025,32.715)
U3: R5.1 R13.2 R27.1 | length 66.7
  Top w0.406: v1(114.935,44.78) 116.205,46.05 116.205,74.625 123.19,81.61 R27.1@123.19,81.712
  Bottom w0.406: R13.2@94.31,42.875 94.31,41.605 94.615,41.275 95.885,41.275 96.114,41.072 R5.1@96.114,40.005 ; R13.2@94.412,42.875 94.412,43.942 94.945,44.45 103.835,44.45 104.14,44.78 v1(114.935,44.78)
pads on no net: AC1002_1.P$3 U$1.NC U$1.NC1 U$3.ALE U$3.DAC0 U$3.DAC1 U$3.GND2 U$3.GND3 U$3.INT0 U$3.MISO U$3.MOSI U$3.P00 U$3.P01 U$3.P02 U$3.P03 U$3.P04 U$3.P05 U$3.P06 U$3.P07 U$3.P20 U$3.P21 U$3.P22 U$3.P23 U$3.P24 U$3.P25 U$3.P34 U$3.P35 U$3.P36 U$3.P37 U$3.PWM0 U$3.PWM1 U$3.SCLOCK U$3.VCC1 U$4.P$1 U$4.P$6 U$4.P$7 U$4.P$8 U$4.P$10 U$4.P$11 U$4.P$12 U$4.P$13 U$4.P$14 U$4.P$15 U$4.P$18 U$4.P$19 U$4.P$22 U$4.P$23 U$4.P$24 U$4.P$26 U$4.P$27 U$4.P$28 U$4.P$29 U$4.P$30 U$4.P$31 U$5.6NC U$5.7NC U$7.P$3 U$12.7 U$13.7 U$14.P$3 U$15.7
copper on no net: | length 3.2
  Top w0.406: 40.843,106.68 cw(c40.866,106.366) 41.072,106.604 ; 43.409,82.779 ccw(c43.183,83.016) 43.51,83.007 ; 46.279,68.174 ccw(c46.041,68.38) 46.355,68.402
  Bottom w0.254: 107.315,66.675 ccw(c106.998,68.897) 108.585,67.31
  Bottom w0.406: 36.754,98.984 cw(c36.96,98.746) 36.982,99.06 ; 43.053,66.675 cw(c43.075,66.361) 43.282,66.599 ; 46.355,63.703 cw(c46.682,63.695) 46.457,63.932 ; 48.184,90.907 cw(c47.946,90.7) 48.26,90.678

## Polygon pours and split planes (outlines as drawn)
GND on Bottom "Bottom-GND" (solid, remove dead copper, pour order 2): 70.917,41.91 70.917,30.091 74.846,26.162 159.164,26.162 176.733,43.731 176.733,113.444 165.514,124.663 103.751,124.663 97.282,118.194 97.282,93.759 89.451,85.928 86.911,85.928 84.642,83.659 84.252,83.269 84.252,71.534 81.712,68.994 81.712,60.241 83.679,58.273 83.947,58.026 83.947,48.674 83.431,48.158 75.481,48.158 70.917,43.594

## Other copper
Top:
  text "ADS  DAU Coupler 3~  05/2012" at 28.905,60.96 h2.76 r90

## Silkscreen, mask and mechanical layers (free items; w line width, h text height)
Dimension:
  the board outline again, w0.15
Unrouted:
  lines w0: 40.005,119.38 40.132,119.38 ; 63.373,86.995 63.5,86.995 ; 83.82,45.415 83.82,45.466 ; 91.491,75.895 91.77,75.895 ; 94.31,42.875 94.412,42.875 ; 96.114,32.614 96.114,32.715 ; 106.299,65.659 106.375,65.735 ; 106.68,57.15 106.68,57.429 ; 121.895,93.726 121.92,93.726 ; 124.46,91.719 124.46,91.77 ; 129.134,29.845 129.54,29.845 ; 130.81,35.56 131.064,35.56 ; 133.985,32.385 133.985,32.817 ; 136.525,100.609 136.525,100.66 ; 137.16,93.675 137.16,93.726 ; 141.402,68.275 141.402,68.377 ; 163.195,95.25 163.195,95.529 ; 169.545,114.935 169.875,114.935 ; 172.085,49.86 172.085,50.495
Outline:
  the board outline again, w0.15

## Text inside footprints (layer, text, board x,y; h text height)
AC1002_1: Top Overlay "Current Transformer" at 110.185,33.985 h1.97 r90; Top Overlay "3" at 112.09,40.97 h1.97 r90; Top Overlay "2" at 107.645,35.255 h1.97 r90; Top Overlay "1" at 107.645,46.685 h1.97 r90
SV1: Top Overlay "4" at 147.955,110.744 h1.97 r90; Top Overlay "1" at 147.955,99.187 h1.97 r90
U$7: Top Overlay "Current Transformer" at 127,67.31 h1.97 r270; Top Overlay "3" at 125.095,60.325 h1.97 r270; Top Overlay "2" at 129.54,66.04 h1.97 r270; Top Overlay "1" at 129.54,54.61 h1.97 r270
U$8: Top Overlay "-" at 88.595,67.64 h1.97 r270; Top Overlay "+" at 88.595,62.56 h1.97 r270; Top Overlay "~" at 84.531,62.306 h1.97 r270; Top Overlay "~" at 84.531,67.894 h1.97 r270
U$14: Top Overlay "Current Transformer" at 153.67,35.56 h1.97 r90; Top Overlay "3" at 155.575,42.545 h1.97 r90; Top Overlay "2" at 151.13,36.83 h1.97 r90; Top Overlay "1" at 151.13,48.26 h1.97 r90
U$17: Top Overlay "-" at 88.9,36.195 h1.97 r270; Top Overlay "+" at 88.9,31.115 h1.97 r270; Top Overlay "~" at 84.836,30.861 h1.97 r270; Top Overlay "~" at 84.836,36.449 h1.97 r270
U$19: Top Overlay "-" at 88.9,45.72 h1.97 r270; Top Overlay "+" at 88.9,40.64 h1.97 r270; Top Overlay "~" at 84.836,40.386 h1.97 r270; Top Overlay "~" at 84.836,45.974 h1.97 r270
X1: Top Overlay "5" at 51.435,30.175 h1.97 r270; Top Overlay "1" at 51.435,56.845 h1.97 r270